# Altium PCB cando_pro.PcbDoc
Units mil, origin at the board's own origin, x right, y up, seen from the top; angles counter-clockwise.
Board outline 1968.5 x 629.92 mil, 2 copper layers (Top Layer, Bottom Layer); 32 components, 22 nets, 145 pads, 116 vias.
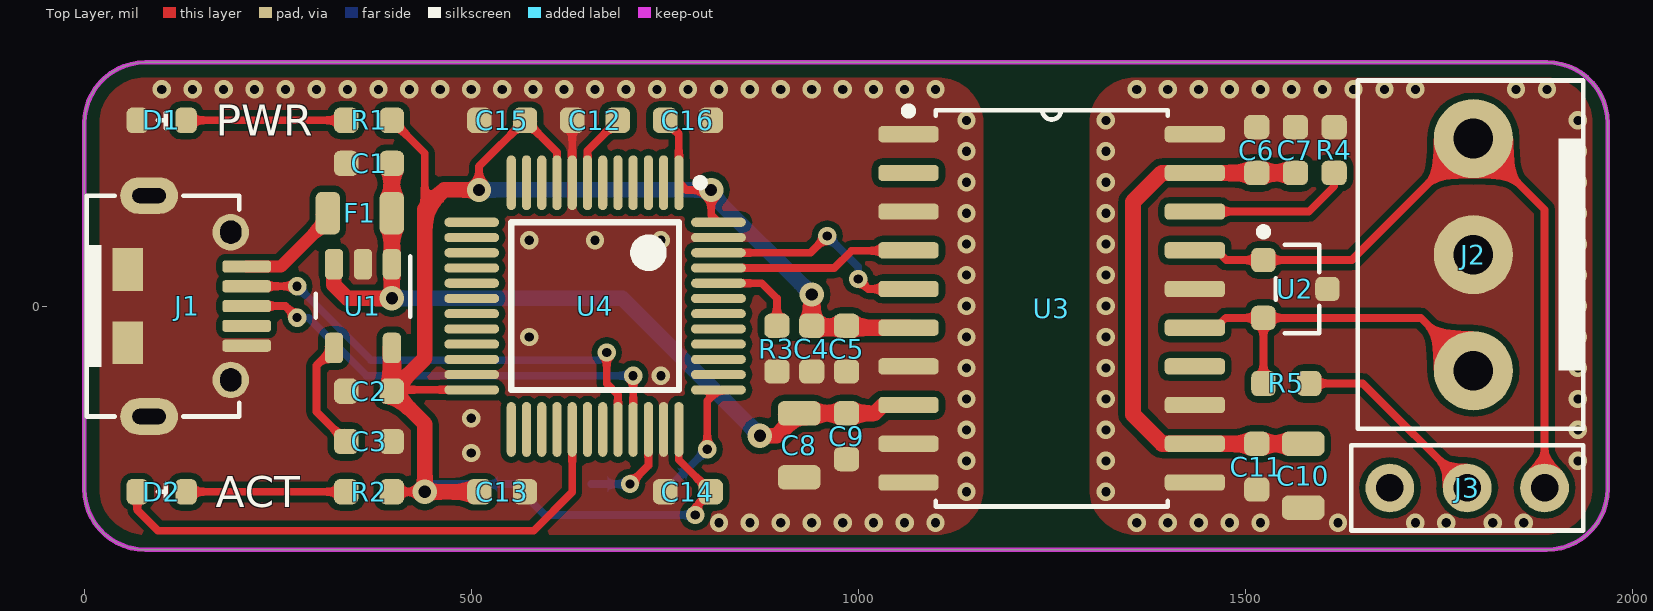
[diagram p0: Top Layer view]
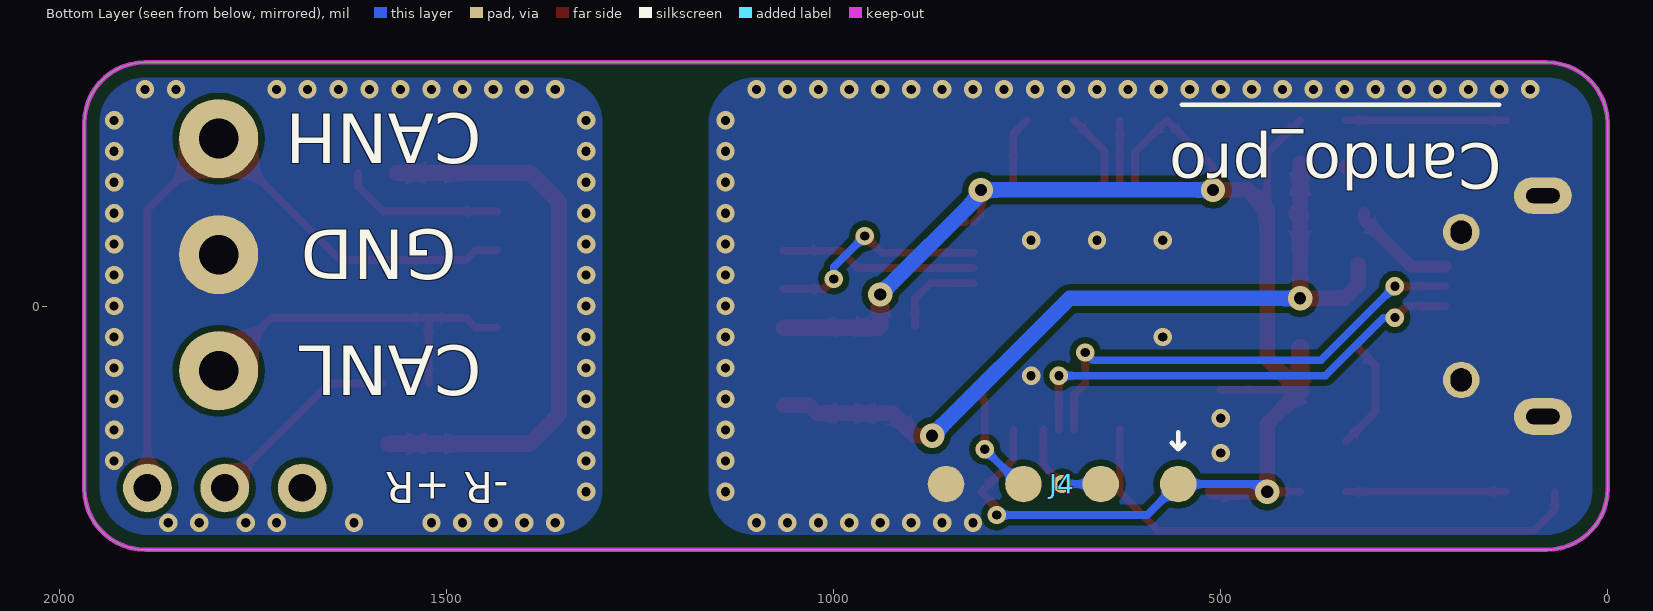
[diagram p1: Bottom Layer view, seen from below]

## Layer stack, top to bottom
Top Solder: solder mask 0.4, Solder Resist, Dk 3.5
Top Layer: signal copper 1.4
Dielectric 1: dielectric 12.6, FR-4, Dk 4.8
Bottom Layer: signal copper 1.4
Bottom Solder: solder mask 0.4, Solder Resist, Dk 3.5

## Board outline
78.74,-314.96 cw(c78.74,-236.22) 0,-236.22 0,236.22 cw(c78.74,236.22) 78.74,314.96 1890.17,314.96 cw(c1890.17,236.63) 1968.5,236.63 1968.5,-236.12 cw(c1889.66,-236.12) 1889.66,-314.96

## Design rules (kind name [scope] priority, off if disabled: settings)
Clearance Clearance_polygon [InPolygon] p1: gap=8
Clearance [All] p2: gap=6
PolygonConnect [All] p1: connectstyle=Direct reliefconductorwidth=10 reliefentries=4 polygonreliefangle="90 Angle" airgapwidth=10
RoutingVias [All] p1: holewidth=28 width=50 viastyle="Through Hole" minholewidth=7.87 minwidth=3.94 maxholewidth=78.74 maxwidth=393.7
SolderMaskExpansion [All] p1: expansion=4
Width [All] p1: maxlimit=236.22 minlimit=3.94 preferedwidth=10
30 further rules are at their usual default settings.

## Components (designator, comment, footprint, x,y, rotation, side; value= is the part's Value field where it differs from the comment)
C1 "4.7μF" 0603C 367.87,184.39 r180 top
C2 "4.7μF" 0603C 367.87,-110 r180 top
C3 "22nF" 0603C 367.87,-175 r180 top
C4 "100nF" 0603C 940,-55 r270 top
C5 "10nF" 0603C 985,-55 r270 top
C6 "100nF" 0603C 1515,201.61 r90 top
C7 "10nF" 0603C 1565,201.61 r90 top
C8 "10μF" 0805C 923.82,-180 r270 top
C9 "100nF" 0603C 985,-168.19 r270 top
C10 "10μF" 0805C 1575,-219.26 r270 top
C11 "100nF" 0603C 1515,-207.45 r270 top
C12 "100nF" 0603C 660,240 r180 top
C13 "100nF" 0603C 540,-240 r0 top
C14 "100nF" 0603C 780,-240 r180 top
C15 "100nF" 0603C 540,240 r180 top
C16 "100nF" 0603C 780,240 r0 top
D1 "PWR" LED_0603_GREEN 100,240 r180 top
D2 "ACT" LED_0603_BLUE 100,-240 r180 top
F1 "Fuse" 0805R 356.06,120 r0 top
J1 "MicroUSB-B" USB-MICRO 133,0 r0 top
J2 "" 3.81_3_PIN 1795,66.5 r0 top
J3 "" HEADER_3 1787,-235 r270 top
J4 "" HEADER_4_PAD 705,-230 r270 bottom
R1 "10K" 0603R 367.87,240 r180 top
R2 "10K" 0603R 367.87,-240 r180 top
R3 "10K" 0603R 895,-55 r270 top
R4 "10R" 0603R 1615,201.61 r270 top
R5 "120R" 0603R 1553.19,-100 r0 top
U1 "RT9193-33GB" SOT-23-5 360,0 r270 top
U2 "PSM712-LF-T7" SOT-23-3 1565,22.08 r270 top
U3 "ADM3053" RW-20 1250,-2.92 r0 top
U4 "STM32F072C8T6" STM-LQFP48_N 660,0 r270 top

## Footprints (in the part's own frame and the unit in brackets; to place one, negate y for a bottom-side part, rotate by r counter-clockwise, add the part's x,y. Pads: shape width x height; smd on the part's side, far side on the other; paste and mask are expansions set on the pad)
3.81_3_PIN [mm] "C36790， 宁波康奈克斯"
  round 2.6 hole 1.3: 1(0,3.81) 2(0,0) 3(0,-3.81)
  silkscreen extent -3.8,-5.71 3.6,5.71, body extent -3.74,-5.71 3.56,5.71, height 8.5
0603C [mm]
  rrect50% 0.8x0.83 smd: 1(-0.75,0) 2(0.75,0)
  body extent -0.8,-0.4 0.8,0.4, height 0.4
0603R [mm]
  rrect50% 0.8x0.83 smd: 1(-0.75,0) 2(0.75,0)
  body extent -0.8,-0.4 0.8,0.4, height 0.4
0805C [mm]
  rrect50% 0.8x1.4 smd: 1(-1.05,0) 2(1.05,0)
  body extent -1,-0.62 1,0.63, height 0.5
0805R [mm]
  rrect50% 0.8x1.4 smd: 1(-1.05,0) 2(1.05,0)
  body extent -1,-0.62 1,0.63, height 0.5
HEADER_3 [mm]
  round 1.6 hole 0.9: 1(0,2.54) 2(0,0) 3(0,-2.54)
  silkscreen extent -1.4,-3.81 1.4,3.81, body extent -1.27,-3.81 1.27,3.81, height 8
HEADER_4_PAD [mm]
  round 1.2 smd: 1(0,3.81) 2(0,1.27) 3(0,-1.27) 4(0,-3.81)
LED_0603_BLUE [mm]
  rrect50% 0.7x0.83 smd: 1(-0.8,0) 2(0.8,0)
  silkscreen extent -0.13,-0.25 0.13,0.25, body extent -0.8,-0.4 0.8,0.4, height 0.4
LED_0603_GREEN [mm]
  rrect50% 0.7x0.83 smd: 1(-0.8,0) 2(0.8,0)
  silkscreen extent -0.13,-0.25 0.13,0.25, body extent -0.8,-0.4 0.8,0.4, height 0.4
RW-20 [mil]
  rrect50% 78x21 smd: 1(-185,225) 2(-185,175) 3(-185,125) 4(-185,75) 5(-185,25) 6(-185,-25) 7(-185,-75) 8(-185,-125) 9(-185,-175) 10(-185,-225) 11(185,-225) 12(185,-175) 13(185,-125) 14(185,-75) 15(185,-25) 16(185,25) 17(185,75) 18(185,125) 19(185,175) 20(185,225)
  silkscreen extent -190,-256 150,260, body extent -203,-252 203,252, height 102
SOT-23-3 [mm]
  rrect50% 0.8x0.8 smd: 1(-0.95,-1.05) 2(0.95,-1.05) 3(0,1.05)
  silkscreen extent -2,-1.17 1.45,0.78, body extent -1.46,-1.04 1.46,1.3, height 1
SOT-23-5 [mm]
  rrect50% 1x0.6 smd paste+0 mask+0.051: 1(-1.375,0.95) 2(-1.375,0) 3(-1.375,-0.95) 4(1.375,-0.95) 5(1.375,0.95)
  silkscreen extent -1.63,-1.55 0.38,1.55, body extent -1.23,-1.5 1.27,1.5, height 1.05
STM-LQFP48_N [mm] "QFP, 48-Leads, Body 7x7mm, Pitch 0.5mm, IPC Medium Density"
  oval 1.8x0.3 smd: 1(-4.05,2.75) 2(-4.05,2.25) 3(-4.05,1.75) 4(-4.05,1.25) 5(-4.05,0.75) 6(-4.05,0.25) 7(-4.05,-0.25) 8(-4.05,-0.75) 9(-4.05,-1.25) 10(-4.05,-1.75) 11(-4.05,-2.25) 12(-4.05,-2.75) 25(4.05,-2.75) 26(4.05,-2.25) 27(4.05,-1.75) 28(4.05,-1.25) 29(4.05,-0.75) 30(4.05,-0.25) 31(4.05,0.25) 32(4.05,0.75) 33(4.05,1.25) 34(4.05,1.75) 35(4.05,2.25) 36(4.05,2.75)
  oval 0.3x1.8 smd: 13(-2.75,-4.05) 14(-2.25,-4.05) 15(-1.75,-4.05) 16(-1.25,-4.05) 17(-0.75,-4.05) 18(-0.25,-4.05) 19(0.25,-4.05) 20(0.75,-4.05) 21(1.25,-4.05) 22(1.75,-4.05) 23(2.25,-4.05) 24(2.75,-4.05) 37(2.75,4.05) 38(2.25,4.05) 39(1.75,4.05) 40(1.25,4.05) 41(0.75,4.05) 42(0.25,4.05) 43(-0.25,4.05) 44(-0.75,4.05) 45(-1.25,4.05) 46(-1.75,4.05) 47(-2.25,4.05) 48(-2.75,4.05)
  silkscreen extent -4.17,-2.75 2.75,3.58, body extent -4.5,-4.5 4.5,4.5, height 1.6
USB-MICRO [mm]
  rrect50% 1.6x0.4 smd: 1(1.95,1.3) 2(1.95,0.65) 3(1.95,0) 4(1.95,-0.65) 5(1.95,-1.3)
  rect 1x1.4 smd: 6(-1.95,-1.2) 6(-1.95,1.2)
  oval 1.9x1.2 hole 0.5 slot 1.1 at 0 deg: 6(-1.25,-3.625) 6(-1.25,3.625)
  round 1.2 hole 0.7 slot 0.762 at 90 deg: 6(1.43,-2.425) 6(1.43,2.425)
  silkscreen extent -3.32,-3.62 1.71,3.63, body extent -3.81,-4.1 1.62,4.1, height 2.72

## Part data
C1 C2 C3 C4 C5 C6 C7 C8 C9 C10 C11 C12 C13 C14 C15 C16: "Capacitor"
D1 D2: library part LED, "LED"
J1: "MicroUSB-B-SMT"
J2: library part Junction_3P, "3.81_3_PIN, C36790, 宁波康奈克斯"
J3: library part Junction_3P, "2.54_3_PIN"
R1 R2 R3 R4 R5: "Resistor"
U1: "Chip, RT9193-33GB, LDO Regulator"
U2: "TVS"
U3: "IC, Signal and power isolated CAN transceiver"
U4: "ARM Cortex-M0 32-bit MCU, 64 KB Flash, 8 KB Internal RAM, 39 I/Os, 48-pin LQFP, -40 to 85 degC, Tray"

## Via types
v1: diameter 23.62, hole 11.81, Top Layer to Bottom Layer, tented both sides, 110 vias
v2: diameter 31.5, hole 15.75, Top Layer to Bottom Layer, tented both sides, 6 vias

## Nets (pads, with @x,y where several pads share a name; then routed paths per layer and width w, separated by ;. In a path a pad name is that pad's centre, name@x,y a point inside that pad or via, vN(x,y) a via of type N, cw(c..) or ccw(c..) an arc to the next point about the centre after c; other vN are vias at no path point)
CAN_H: J2.1 J3.1 U2.1 U3.17 | length 919.9
  Top Layer w10: U3.17 1462.92,72.08 1475.52,59.48 U2.1 1637.98,59.48 J2.1 1887,124.5 J3.1
CAN_L: J2.3 R5.1 U2.2 U3.15 | length 478.1
  Top Layer w10: U3.15 1462.6,-27.92 1475.2,-15.32 U2.2 ; R5.1 U2.2 ; J2.3 1726.82,-15.32 U2.2
CAN_RX: U3.4 U4.45 | length 254.8
  Top Layer w10: U4.45 969.21,49.21 991.5,71.5 U3.4@1065,71.5
CAN_TX: U3.5 U4.46 | length 291.9
  Top Layer w10: U4.46 938.43,68.9 v1(960,90.47) ; v1(1000,35) 1012.92,22.08 U3.5
  Bottom Layer w10: v1(960,90.47) 1000,50.47 v1(1000,35)
GND: C1.2 C2.2 C3.1 C4.2 C5.2 C8.2 C9.2 C12.2 C13.2 C14.2 C15.2 C16.2 D1.2 J1.5 J1.6 J4.4 R3.2 U1.2 U3.1 U3.3 U3.7 U3.9 U3.10 U4.8 U4.23 U4.35 U4.47 | length 80.6
  Top Layer w10: U4.8 C12.2
  other v1: 820,-280 860,-280 900,-280 940,-280 980,-280 1020,-280 1060,-280 1100,-280 1140,-240 1140,-200 500,-190 1140,-160 500,-145 1140,-120 745,-90 1140,-80 575,-40 1140,-40 1140,0 1140,40 1140,80 575,85 660,85 745,85 1140,120 1140,160 1140,200 1140,240 100,280 140,280 180,280 220,280 260,280 300,280 340,280 380,280 420,280 460,280 500,280 540,280 580,280 620,280 660,280 700,280 740,280 780,280 820,280 860,280 900,280 940,280 980,280 1020,280 1060,280 1100,280
LED_ACT: D2.2 U4.29 | length 698.1
  Top Layer w10: D2.2 68.5,-263.5 95.28,-290.28 580.51,-290.28 630.47,-240.32 U4.29
NetC3_2: C3.2 U1.4 | length 146.1
  Top Layer w10: U1.4 300,-76.73 300,-136.65 C3.2
NetC6_1: C6.1 C7.1 C10.1 C11.1 U3.12 U3.19 | length 735.7
  Top Layer w21: C7.1 C6.1 U3.19 1392.63,172.08 1355,134.45 1355,-140 1392.92,-177.92 U3.12 C11.1 C10.1
NetC12_1: C12.1 U4.7 | length 96.9
  Top Layer w10: U4.7 650.16,200.63 C12.1
NetD1_1: D1.1 R1.2 | length 206.9
  Top Layer w10: D1.1 R1.2
NetD2_1: D2.1 R2.2 | length 206.9
  Top Layer w10: D2.1 R2.2
NetF1_1: F1.1 J1.1 | length 138.2
  Top Layer w15.75: J1.1 254,51.18 314.72,111.91 F1.1
NetJ3_2: J3.2 R5.2 | length 260.2
  Top Layer w10: R5.2 1652,-100 J3.2
NetR3_1: R3.1 U4.44 | length 119.1
  Top Layer w10: U4.44 875.47,29.53 895,10 R3.1
NetR4_2: R4.2 U3.18 | length 210.7
  Top Layer w10: U3.18 1582.08,122.08 1615,155 R4.2
PGND: C6.2 C7.2 C10.2 C11.2 J2.2 R4.1 U2.3 U3.11 U3.13 U3.16 U3.20
  other v1: 1360,-280 1400,-280 1440,-280 1480,-280 1520,-280 1620,-280 1720,-280 1760,-280 1820,-280 1860,-280 1320,-240 1320,-200 1930,-200 1320,-160 1930,-160 1320,-120 1930,-120 1320,-80 1930,-80 1320,-40 1930,-40 1320,0 1930,0 1320,40 1930,40 1320,80 1930,80 1320,120 1930,120 1320,160 1930,160 1320,200 1930,200 1320,240 1930,240 1360,280 1400,280 1440,280 1480,280 1520,280 1560,280 1600,280 1640,280 1680,280 1720,280 1850,280 1890,280
SWCLK: J4.3 U4.37 | length 151.4
  Top Layer w10: v1(805,-185) 805,-122.72 U4.37
  Bottom Layer w10: J4.3 760,-230 v1(805,-185)
SWDIO: J4.2 U4.34 | length 130.4
  Top Layer w10: v1(705,-230) 728.9,-206.1 U4.34
  Bottom Layer w10: J4.2 v1(705,-230)
USB_DM: J1.2 U4.32 | length 614.4
  Top Layer w10: J1.2 v1(275,25.59) ; v1(675,-60) 675,-100 689.53,-114.53 U4.32
  Bottom Layer w10: v1(275,25.59) 370.59,-70 665,-70 v1(675,-60)
USB_DP: J1.3 U4.33 | length 606.2
  Top Layer w10: J1.3 260,0 v1(275,-15) ; U4.33 v1(709.21,-90)
  Bottom Layer w10: v1(275,-15) 289.72,-15 364.72,-90 v1(709.21,-90)
V3.3: C2.1 C4.1 C5.1 C13.1 C14.1 C15.1 C16.1 J4.1 R1.1 R2.1 U1.5 U3.6 U4.1 U4.9 U4.24 U4.36 U4.48 | length 2458.4
  Top Layer w10: R2.1 v2(440,-240) ; C2.1 399.13,-108.27 U4.24 ; R1.1 440,197.4 440,125 ; v2(510,150) 510,180.47 C15.1 610.79,198.74 U4.9 ; C16.1 768.27,222.2 U4.1 777.72,150 v2(810,150) 810,117.72 U4.48 ; U4.36 768.27,-198.74 C14.1 789.53,-260 v1(789.53,-270) ; U4.48@830,108.27 U4.48@848.27,108.27
  Top Layer w20: C2.1 440,-152.6 v2(440,-240) C13.1 ; C2.1@399.13,-108.27 440,-67.4 440,125 465,150 v2(510,150)
  Top Layer w21: v2(940,15) C4.1 942.45,-27.92 U3.6
  Top Layer w23.62: C2.1 U1.5
  Bottom Layer w10: v2(440,-240) 450,-230 J4.1 595,-270 v1(789.53,-270)
  Bottom Layer w20: v2(510,150) v2(810,150) 810,145 v2(940,15) v2@936.52,15
VCC: C1.1 C8.1 C9.1 F1.2 U1.1 U1.3 U3.8 | length 1050.2
  Top Layer w20: U1.3 322.6,27.4 340,10 v2(397.4,10) U1.1 397.4,116.06 F1.2 ; C1.1 F1.2 ; F1.2@401.34,120 F1.2 ; v2(872.98,-167.54) 894.94,-167.54 C8.1 C9.1 1021.34,-138.66 1032.08,-127.92 U3.8
  Top Layer w23.62: F1.2@397.4,116.06 F1.2@401.34,120
  Bottom Layer w20: v2(397.4,10) 695.44,10 v2(872.98,-167.54)
pads on no net: J1.4 J3.3 U3.2 U3.14 U4.2 U4.3 U4.4 U4.5 U4.6 U4.10 U4.11 U4.12 U4.13 U4.14 U4.15 U4.16 U4.17 U4.18 U4.19 U4.20 U4.21 U4.22 U4.25 U4.26 U4.27 U4.28 U4.30 U4.31 U4.38 U4.39 U4.40 U4.41 U4.42 U4.43

## Polygon pours and split planes (outlines as drawn)
GND on Top Layer "GND" (solid, pour order 2): 1161.42,236.22 ccw(c1102.36,236.22) 1102.36,295.28 78.74,295.28 ccw(c78.74,236.22) 19.68,236.22 19.68,-236.22 ccw(c78.74,-236.22) 78.74,-295.28 1102.36,-295.28 ccw(c1102.36,-236.22) 1161.42,-236.22
PGND on Top Layer "PGND" (solid, pour order 0): 1299.21,196.85 1299.21,236.22 cw(c1358.27,236.22) 1358.27,295.28 1889.76,295.28 cw(c1889.76,236.22) 1948.82,236.22 1948.82,-233.46 cw(c1887,-233.46) 1887,-295.28 1358.27,-295.28 cw(c1358.27,-236.22) 1299.21,-236.22
PGND on Bottom Layer "PGND" (solid, pour order 8): 1299.21,196.85 1299.21,236.22 cw(c1358.27,236.22) 1358.27,295.28 1889.76,295.28 cw(c1889.76,236.22) 1948.82,236.22 1948.82,-233.46 cw(c1887,-233.46) 1887,-295.28 1358.27,-295.28 cw(c1358.27,-236.22) 1299.21,-236.22
GND on Bottom Layer "GND" (solid, pour order 4): 1161.42,236.22 ccw(c1102.36,236.22) 1102.36,295.28 78.74,295.28 ccw(c78.74,236.22) 19.68,236.22 19.68,-236.22 ccw(c78.74,-236.22) 78.74,-295.28 1102.36,-295.28 ccw(c1102.36,-236.22) 1161.42,-236.22

## Keep-outs
Keep-Out Layer:
  the board outline again, w6

## Silkscreen, mask and mechanical layers (free items; w line width, h text height)
Top Overlay:
  text "PWR" at 170,220.01 h40
  text "ACT" at 170,-259.99 h40
Bottom Overlay:
  lines w6: 140,260 550,260 ; 547,-177 555,-185 ; 555,-163 555,-185 ; 563,-177 555,-185
  text "CANH" at 1455,248.56 h64 r180
  text "Cando_pro" at 137,229 h100 r180
  text "GND" at 1486.99,98.56 h64 r180
  text "CANL" at 1455,-51.51 h64 r180
  text "-R +R" at 1420,-215.01 h40 r180